# Allegro board Stepper_Motor_Prototype.brd
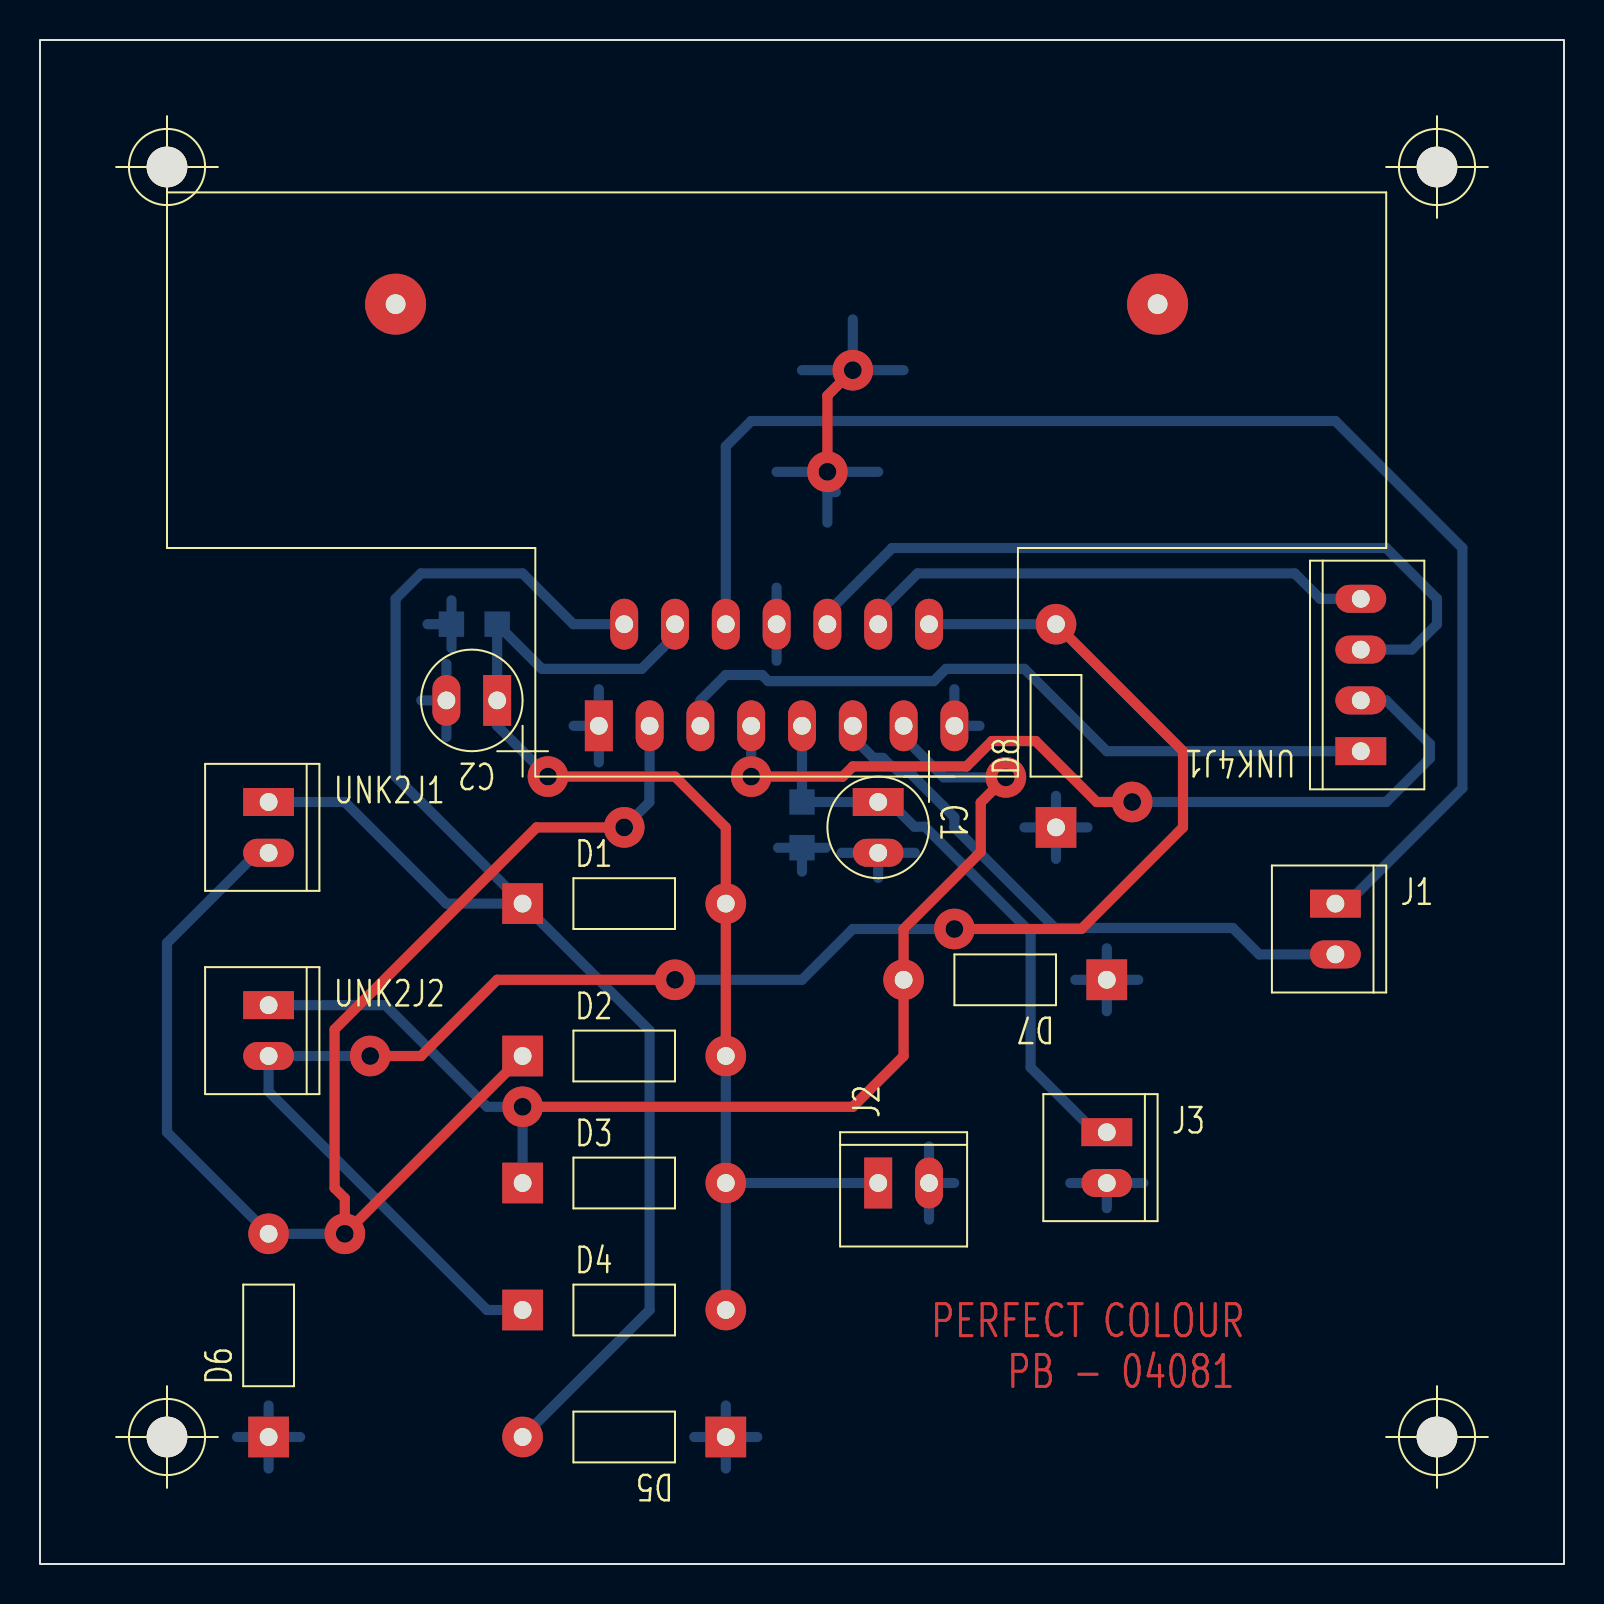
[diagram p0: board, top side]
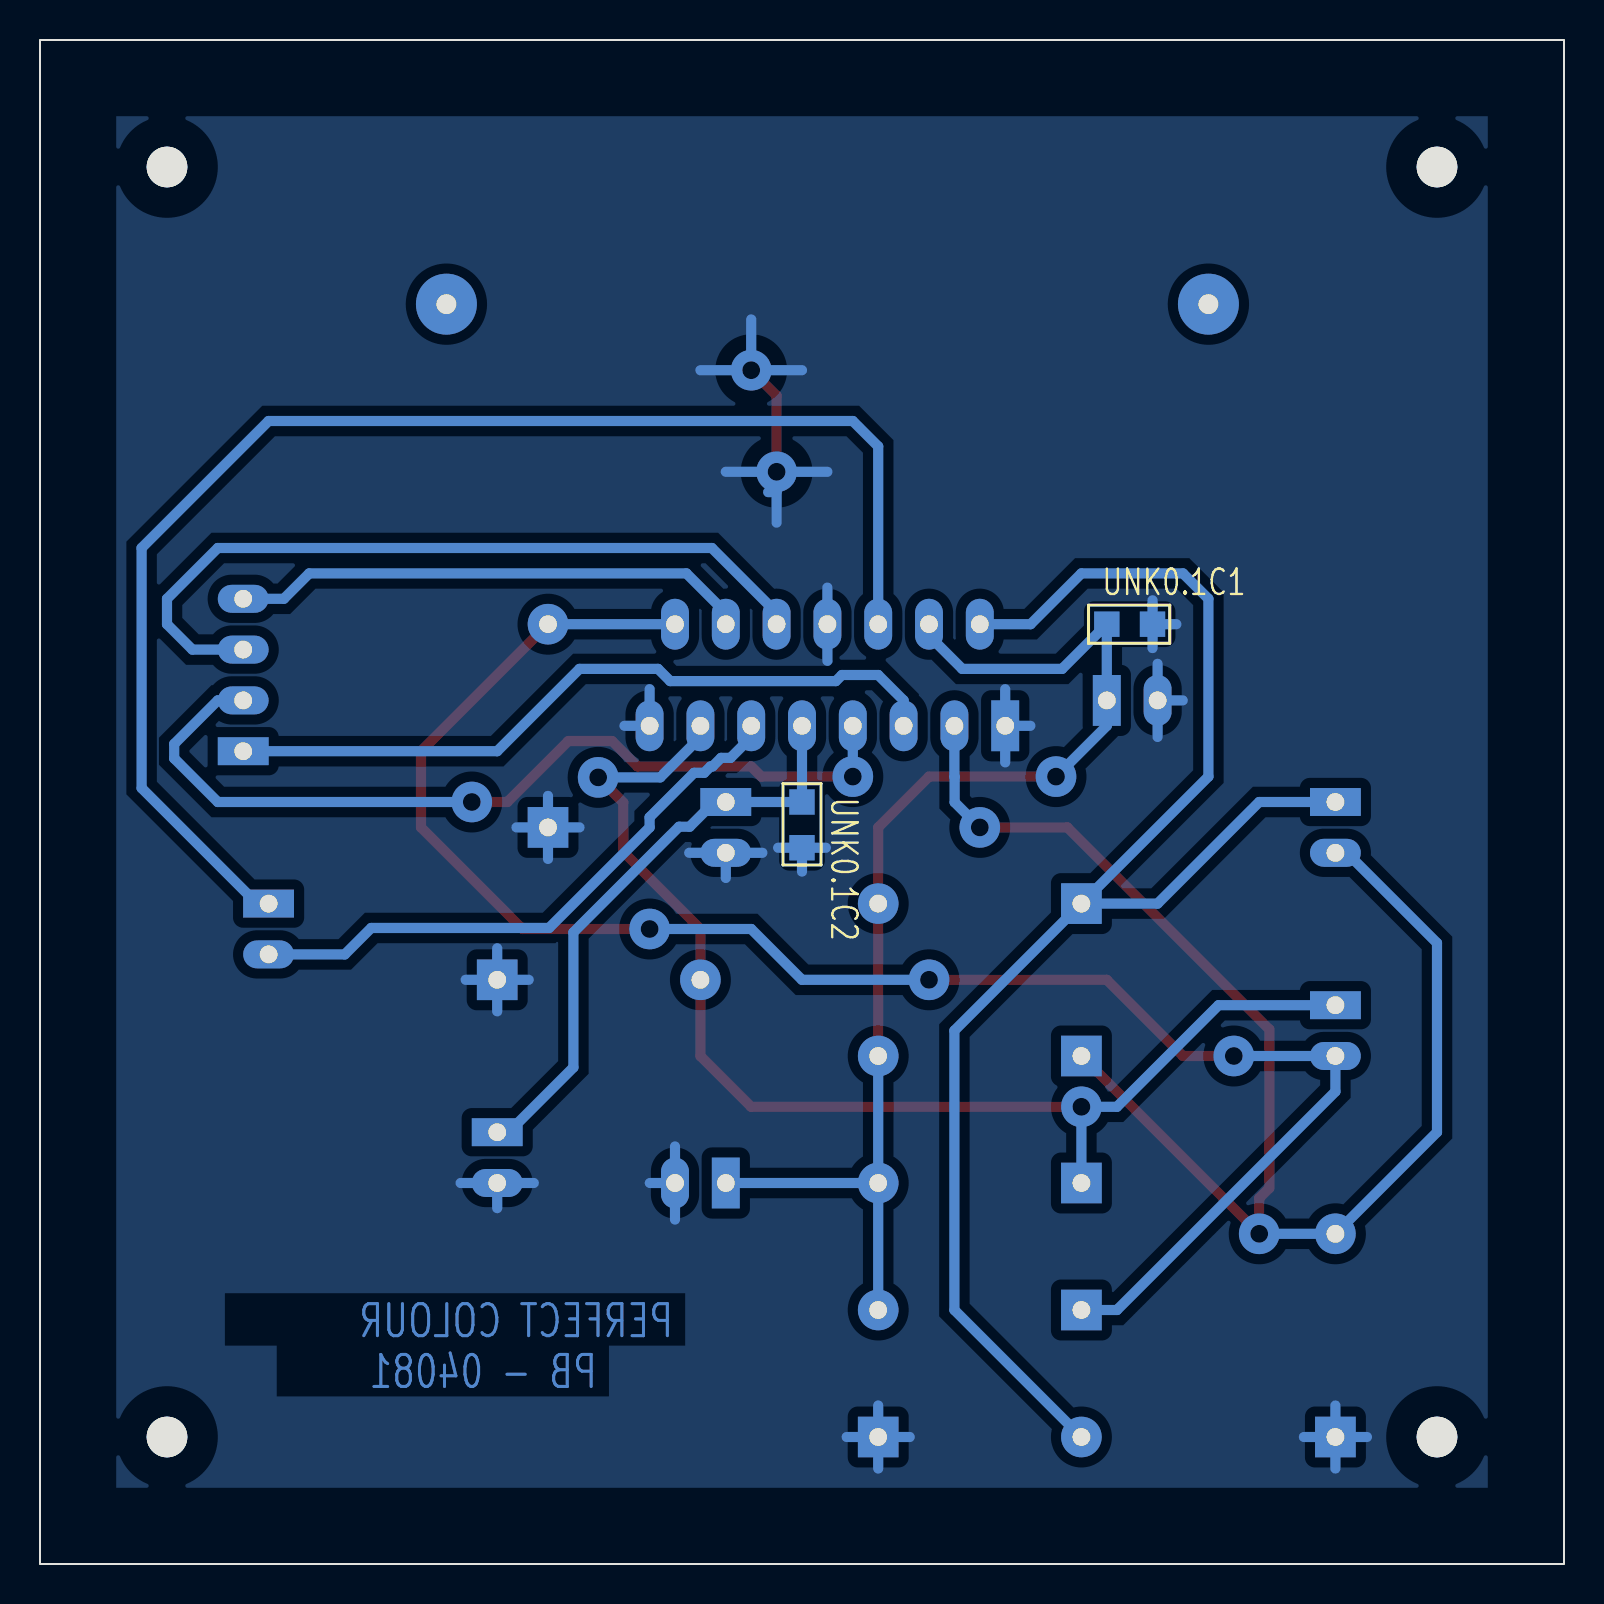
[diagram p1: board, bottom side, seen from below]

Outline 76.2 x 76.2 mm; copper layers: TOP, BOTTOM. Coordinates in mm from the lower left corner of the outline.
Outline path: rectangle 0,0 76.2,76.2

## Design rules (mm)
constraint set DEFAULT: min track width 0.508

## Placement (name value [footprint] x y rotation side)
C1  Cap_e  [GU-CAPCYL100]  41.91 38.1 270 top
C2  Cap_e  [GU-CAPCYL100]  22.86 43.18 180 top
D1  1N5814  [GU-RC400]  24.13 33.02 0 top
D2  1N5814  [GU-RC400]  24.13 25.4 0 top
D3  1N5814  [GU-RC400]  24.13 19.05 0 top
D4  1N5814  [GU-RC400]  24.13 12.7 0 top
D5  1N5814  [GU-RC400]  34.29 6.35 180 top
D6  1N5814  [GU-RC400]  11.43 6.35 90 top
D7  1N5814  [GU-RC400]  53.34 29.21 180 top
D8  1N5814  [GU-RC400]  50.8 36.83 90 top
J1  MOL2  [GU-MOLEX2]  64.77 33.02 0 top
J2  MOL2  [GU-MOLEX2]  41.91 19.05 90 top
J3  MOL2  [GU-MOLEX2]  53.34 21.59 0 top
NOREF  -  [unnamed]  69.85 69.85 0 top
NOREF#2  -  [unnamed]  6.35 6.35 0 top
NOREF#3  -  [unnamed]  6.35 69.85 0 top
NOREF#4  -  [unnamed]  69.85 6.35 0 top
U1  L298N  [GU-L298-HSINK]  27.94 41.91 0 top
UNK0.1C1  100nF_Capacitor  [GU-C0805]  22.86 46.99 180 bottom
UNK0.1C2  100nF_Capacitor  [GU-C0805]  38.1 38.1 270 bottom
UNK2J1  MOLEX2  [GU-MOLEX2]  11.43 38.1 0 top
UNK2J2  MOLEX2  [GU-MOLEX2]  11.43 27.94 0 top
UNK4J1  MOLEX_4  [GU-MOLEX4]  66.04 40.64 180 top

## Library data of the parts
C1 C2 = Cap_e
D1-D8 = 1N5814
J1-J3 = MOL2
U1 = L298N
UNK0.1C1 UNK0.1C2 = 100nF_Capacitor
UNK2J1 UNK2J2 = MOLEX2
UNK4J1 = MOLEX_4

## Footprints (pads in the part's own frame, mm; a bottom-side part is the same pattern mirrored in y, then rotated)
GU-C0805
  rect 1.27x1.27 smd: 1(0,0) 2(2.286,0)
GU-CAPCYL100
  rect 1.397x2.54 hole 0.889: 1(0,0)
  oval 1.397x2.54 hole 0.889: 2(2.54,0)
GU-L298-HSINK
  round 3.048 hole 0.991: (-10.16,21.082) (27.94,21.082)
  rect 1.397x2.54 hole 0.889: 1(0,0)
  oval 1.397x2.54 hole 0.889: 2(1.27,5.08) 3(2.54,0) 4(3.81,5.08) 5(5.08,0) 6(6.35,5.08) 7(7.62,0) 8(8.89,5.08) 9(10.16,0) 10(11.43,5.08) 11(12.7,0) 12(13.97,5.08) 13(15.24,0) 14(16.51,5.08) 15(17.78,0)
GU-MOLEX2
  rect 2.54x1.397 hole 0.889: 1(0,0)
  oval 2.54x1.397 hole 0.889: 2(0,-2.54)
GU-MOLEX4
  rect 2.54x1.397 hole 0.889: 1(0,0)
  oval 2.54x1.397 hole 0.889: 2(0,-2.54) 3(0,-5.08) 4(0,-7.62)
GU-RC400
  rect 2.032x2.032 hole 0.889: 1(0,0)
  round 2.032 hole 0.889: 2(10.16,0)
unnamed
  round 2.032 hole 3.962 unplated: (0,0)

## Nets
GND: C1.2(-) C2.2(-) D5.1 D6.1 D7.1 D8.1 J2.2(EN_B) J3.2(EN_B) U1.1 U1.8 U1.15 UNK0.1C1.2 UNK0.1C2.2
N00112: C2.1 D1.2(K) D2.2(K) D3.2(K) D4.2(K) J2.1 U1.4(SV-VS) UNK0.1C1.1
N00490: D1.1 D5.2(K) U1.2 UNK2J1.1
N00502: D2.1 D6.2(K) U1.3 UNK2J1.2
N00602: D3.1 D7.2(K) U1.13 UNK2J2.1
N00609: D4.1 D8.2(K) U1.14 UNK2J2.2
N01273: C1.1 J3.1 U1.9 UNK0.1C2.1
N01777: U1.5 UNK4J1.1
N01787: U1.7 UNK4J1.2
N01794: U1.10 UNK4J1.3
N01801: U1.12 UNK4J1.4
N01857: J1.1 U1.6
N01864: J1.2(EN_B) U1.11

## Via types
v1: diameter 2.032, hole 0.889, TOP to BOTTOM, 12 vias

## Routing (per net, layer and track width the routed paths; a pad name or vN(x,y) marks a point on that pad's centre or on a via; arc(x,y) is an arc through that point)
GND: length 82.9
  TOP w0.508: v1(39.37,54.61) 39.37,58.42 v1(40.64,59.69)
  BOTTOM w0.508: 20.32,41.35 C2.2 ; C2.2 20.32,45.01 ; C2.2 19.06,43.18 ; 44.45,17.22 J2.2 ; J2.2 44.45,20.88 ; J2.2 45.71,19.05 ; D7.1 54.92,29.21 ; D7.1 53.34,27.63 ; D7.1 51.76,29.21 ; D7.1 53.34,30.79 ; 41.91,34.3 C1.2 ; C1.2 40.08,35.56 ; C1.2 43.74,35.56 ; D6.1 11.43,7.93 ; D6.1 11.43,4.77 ; D6.1 13.01,6.35 ; D6.1 9.85,6.35 ; 39.37,52.07 39.37,53.59 39.79,53.59 ; 50.8,35.25 D8.1 ; D8.1 49.22,36.83 ; D8.1 50.8,38.41 ; D8.1 52.38,36.83 ; 34.29,4.77 D5.1 ; D5.1 34.29,7.93 ; D5.1 32.71,6.35 ; D5.1 35.87,6.35 ; 36.83,45.16 U1.8 36.83,48.82 ; 45.72,43.74 U1.15 46.98,41.91 ; 36.83,54.61 v1(39.37,54.61) 41.91,54.61 ; 40.64,62.23 v1(40.64,59.69) 38.1,59.69 ; 19.38,46.99 UNK0.1C1.2 ; UNK0.1C1.2 20.57,45.8 ; UNK0.1C1.2 20.57,48.18 ; U1.1 27.94,43.74 ; U1.1 27.94,40.08 ; U1.1 26.68,41.91 ; 41.66,59.69 43.18,59.69 ; 53.34,17.79 J3.2 ; J3.2 55.17,19.05 ; J3.2 51.51,19.05 ; UNK0.1C2.2 39.29,35.81 ; UNK0.1C2.2 38.1,34.62 ; UNK0.1C2.2 36.91,35.81
N00112: length 61.4
  TOP w0.508: D2.2 D1.2 34.29,36.83 31.75,39.37 v1(25.4,39.37)
  BOTTOM w0.508: D3.2 D4.2 ; D3.2 J2.1 ; D3.2 D2.2 ; U1.4 31.75,46.42 30.09,44.76 25.09,44.76 UNK0.1C1.1 C2.1 22.86,41.91 v1(25.4,39.37)
N00490: length 77.6
  BOTTOM w0.508: D1.1 30.48,26.67 30.48,12.7 D5.2 ; D1.1 17.78,39.37 17.78,48.26 19.05,49.53 24.13,49.53 26.67,46.99 U1.2 ; D1.1 20.32,33.02 15.24,38.1 UNK2J1.1
N00502: length 74.7
  TOP w0.508: D2.1 v1(15.24,16.51) 15.24,18.29 14.73,18.8 14.73,26.73 24.83,36.83 v1(29.21,36.83)
  BOTTOM w0.508: UNK2J1.2 10.86,35.56 6.35,31.05 6.35,21.59 D6.2 v1(15.24,16.51) ; v1(29.21,36.83) 30.47,38.09 30.47,39.36 30.48,39.37 U1.3
N00602: length 61.3
  TOP w0.508: v1(48.29,39.33) 47.04,38.07 47.04,35.61 43.18,31.75 D7.2 43.18,25.4 40.64,22.86 v1(24.13,22.86)
  BOTTOM w0.508: U1.13 43.18,41.34 45.19,39.33 v1(48.29,39.33) ; D3.1 v1(24.13,22.86) 22.35,22.86 17.27,27.94 UNK2J2.1
N00609: length 88.6
  TOP w0.508: v1(45.72,31.75) 52.07,31.75 57.15,36.83 57.15,40.64 D8.2 ; v1(31.75,29.21) 22.86,29.21 19.05,25.4 v1(16.51,25.4)
  BOTTOM w0.508: D4.1 22.35,12.7 11.43,23.62 UNK2J2.2 v1(16.51,25.4) ; v1(31.75,29.21) 38.1,29.21 40.64,31.75 v1(45.72,31.75) ; D8.2 U1.14
N01273: length 29.8
  BOTTOM w0.508: U1.9 UNK0.1C2.1 C1.1 42.48,38.1 43.72,36.86 44.25,36.86 49.53,31.58 49.53,24.83 52.77,21.59 J3.1
N01777: length 36.9
  BOTTOM w0.508: UNK4J1.1 53.34,40.64 49.22,44.76 45.3,44.76 44.69,44.14 36.41,44.14 36.1,44.45 34.29,44.45 33.02,43.18 U1.5
N01787: length 44.4
  TOP w0.508: v1(54.61,38.1) 52.83,38.1 49.78,41.15 47.6,41.15 46.33,39.88 40.64,39.88 40.13,39.37 v1(35.56,39.37)
  BOTTOM w0.508: UNK4J1.2 67.31,43.18 69.49,41 69.49,40.28 67.31,38.1 v1(54.61,38.1) ; U1.7 v1(35.56,39.37)
N01794: length 39.1
  BOTTOM w0.508: UNK4J1.3 68.58,45.72 69.85,46.99 69.85,48.26 67.31,50.8 42.61,50.8 39.37,47.56 U1.10
N01801: length 26
  BOTTOM w0.508: U1.12 41.91,47.56 43.88,49.53 62.74,49.53 64.01,48.26 UNK4J1.4
N01857: length 69.6
  BOTTOM w0.508: U1.6 34.29,55.88 35.56,57.15 64.77,57.15 71.12,50.8 71.12,38.8 65.34,33.02 J1.1
N01864: length 29.5
  BOTTOM w0.508: U1.11 40.64,41.34 41.67,40.31 42.15,40.31 42.57,39.88 42.67,39.88 42.99,39.56 43.5,39.56 45.72,37.34 45.72,36.83 50.75,31.8 59.64,31.8 60.96,30.48 J1.2

## Copper pours and planes (outline as drawn; the poured copper is in the pictures)
GND on BOTTOM: 3.81,72.39 3.81,3.81 72.39,3.81 72.39,72.39 ; 2 cut-outs

## Text on the board
BOTTOM: PERFECT COLOUR | PB - 04081
TOP: PERFECT COLOUR | PB - 04081
